# Altium PCB Current Loop PM8841.PcbDoc
Units mil, origin at the board's own origin, x right, y up, seen from the top; angles counter-clockwise.
Board outline 1375 x 890 mil, 2 copper layers (Top Layer, Bottom Layer); 18 components, 12 nets, 44 pads, 7 vias.
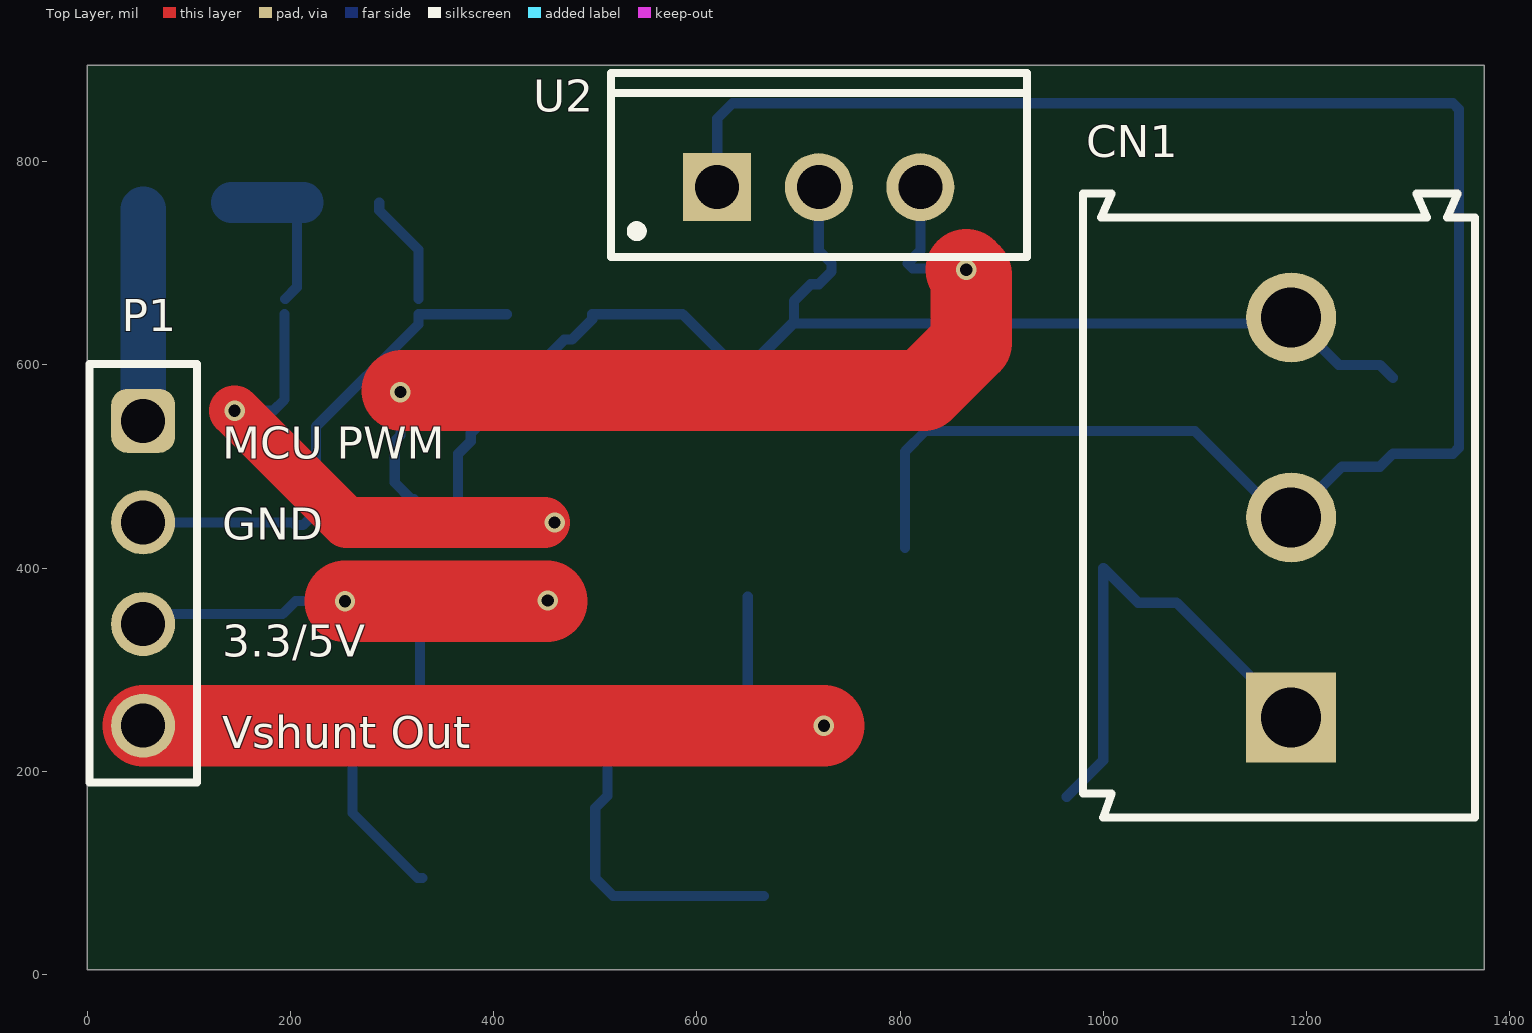
[diagram p0: Top Layer view]
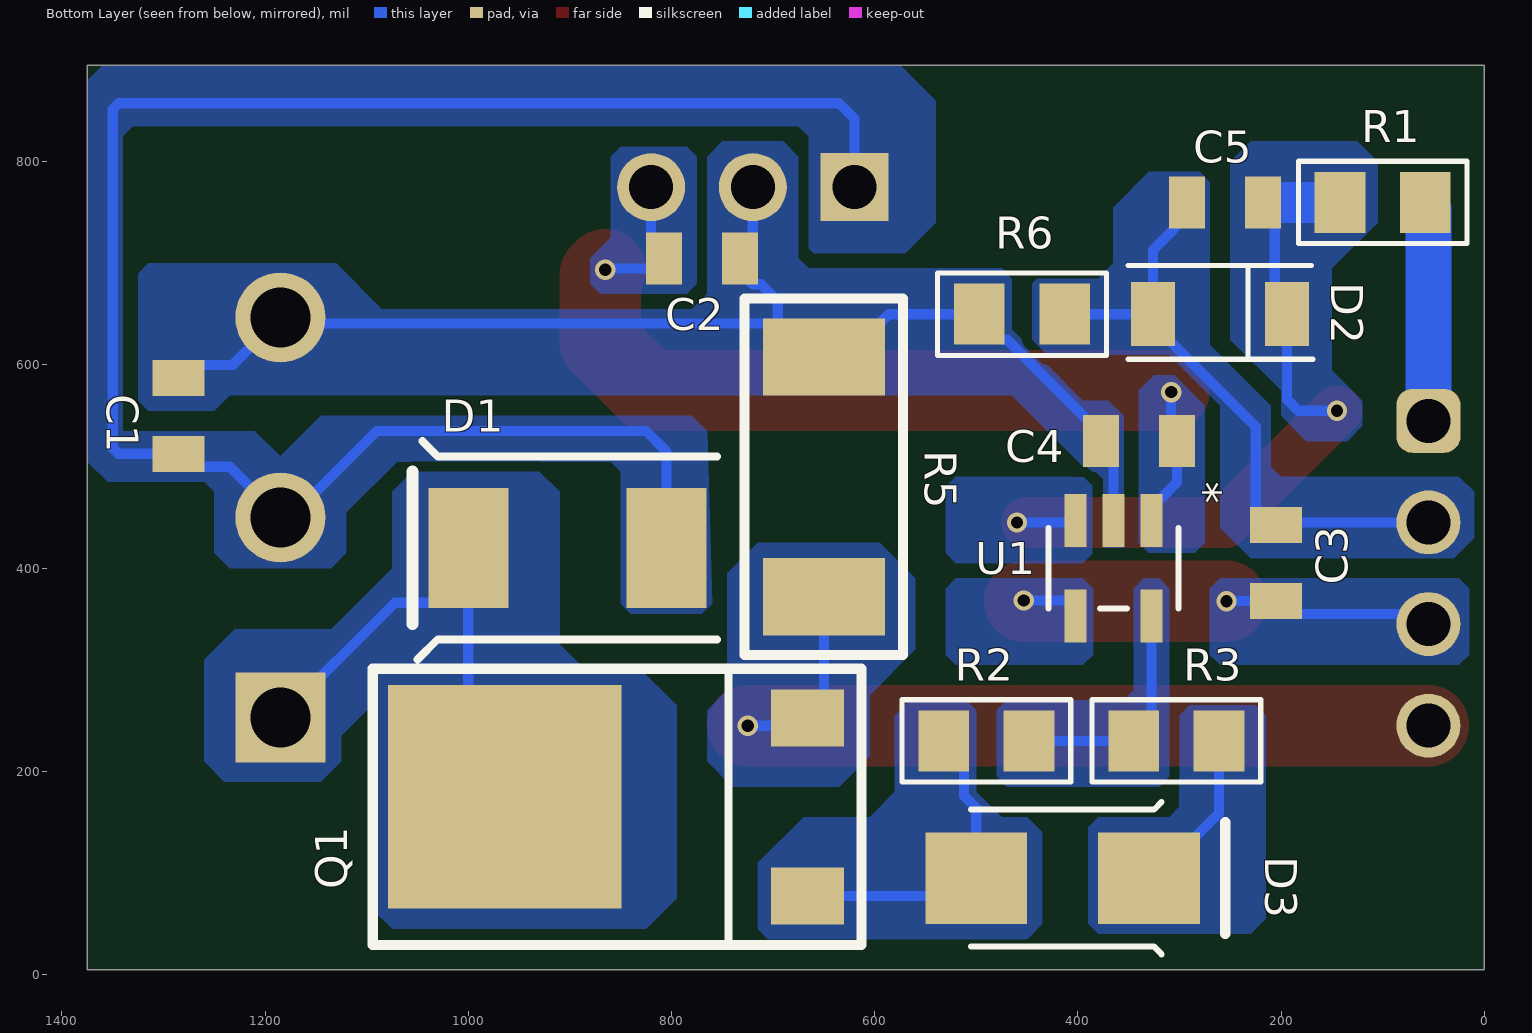
[diagram p1: Bottom Layer view, seen from below]
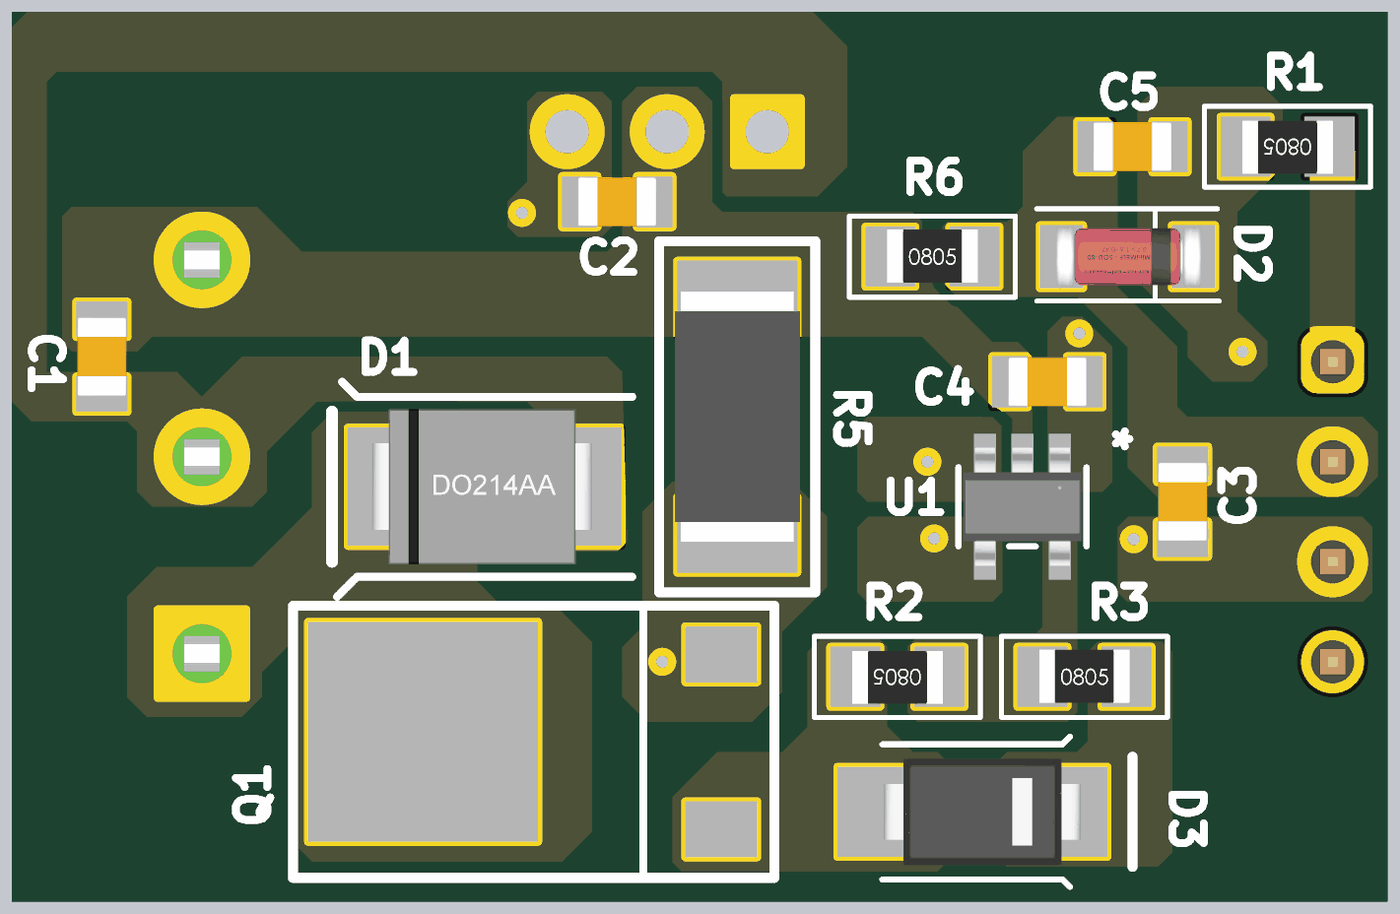
[diagram p2: 3D render of the assembled board from below, using the file's embedded part models]

## Layer stack, top to bottom
Top Solder: solder mask 0.4, Solder Resist, Dk 3.5
Top Layer: signal copper 1.4
Dielectric 1: dielectric 12.6, FR-4, Dk 4.8
Bottom Layer: signal copper 1.4
Bottom Solder: solder mask 0.4, Solder Resist, Dk 3.5

## Board outline
0,5 1375,5 1375,895 0,895

## Design rules (kind name [scope] priority, off if disabled: settings)
Clearance [All] p1: gap=10 ignorepadtopadclearanceinfootprint=FALSE except(0: Arc-Hole Track-Hole SMDPad-Hole THPad-Hole Via-Hole Fill-Hole Poly-Hole Region-Hole Text-Hole)
MinimumSolderMaskSliver [All] p1: minsoldermaskwidth=2
PlaneConnect [All] p1: planeconnectstyle=Direct reliefexpansion=20 reliefentries=4 reliefconductorwidth=10 reliefairgap=10
PolygonConnect [All] p1: connectstyle=Direct reliefconductorwidth=10 reliefentries=4 polygonreliefangle="90 Angle" airgapwidth=10
RoutingVias [All] p1: holewidth=28 width=50 viastyle="Through Hole" minholewidth=28 minwidth=50 maxholewidth=28 maxwidth=50
SilkToSilkClearance [All] p1: silktosilkclearance=5
SilkToSolderMaskClearance [IsPad] p1: minsilkscreentomaskgap=2 clearancetoexposedcopper=TRUE
SolderMaskExpansion [All] p1: expansion=4 istentingtop=FALSE
Width [All] p1: maxlimit=200 minlimit=10 preferedwidth=10 minimp=50.000000 maximp=50.000000 favimp=50.000000
26 further rules are at their usual default settings.

## Components (designator, comment, footprint, x,y, rotation, side; value= is the part's Value field where it differs from the comment)
C1 "330nF" WCAP-CSGP_0805_L2W1.25H1.25 1285,550 r270 bottom
C2 "100nF" WCAP-CSGP_0805_L2W1.25H0.8_Reflow 770,705 r0 bottom
C3 "1µF" WCAP-CSGP_0805_L2W1.25H1.25 205,405 r270 bottom
C4 "1µF" WCAP-CSGP_0805_L2W1.25H1.25 340,525 r180 bottom
C5 "47pF" WCAP-CSGP_0805_L2W1.25H0.6_Reflow 255,760 r180 bottom
CN1 "691216710003" 691216710003 1173.19,450 r90 top
D1 "SMB" SMB 905,420 r180 bottom
D2 "5V6" SOD80 260,650 r0 bottom
D3 "SMA_Schottky" SMA 415,95 r0 bottom
P1 "61300411121" 61300411121 55,395 r270 top
Q1 "STD30NF06LT4" NFET_DPAK 815,165 r0 bottom
R1 "470R" SM/R_0805 100,760 r0 bottom
R2 "22R" SM/R_0805 490,230 r0 bottom
R3 "4R7" SM/R_0805 303,230 r180 bottom
R5 "1R - 2W" SM/R_2512 650,490 r270 bottom
R6 "NM" SM/R_0805 455,650 r180 bottom
U1 "PM8841D" SOT23-5_STM 365,400 r270 bottom
U2 "L7812CV" TO220 720,775 r0 top

## Footprints (in the part's own frame and the unit in brackets; to place one, negate y for a bottom-side part, rotate by r counter-clockwise, add the part's x,y. Pads: shape width x height; smd on the part's side, far side on the other; paste and mask are expansions set on the pad)
61300411121 [mm] "Pin Header, pitch 2.54 mm, THT, Vertical, single row, 4p"
  rrect50% 1.6x1.6 hole 1.1: 1(-3.81,0)
  round 1.6 hole 1.1: 2(-1.27,0) 3(1.27,0) 4(3.81,0)
  silkscreen extent -5.23,-1.35 5.23,1.35, body extent -5.08,-1.27 5.08,1.27, height 8.57
691216710003 [mm] "Serie 2167 - 5.00 mm _ 3 pins"
  rect 2.25x2.25 hole 1.5: 1(-5,-0.3)
  round 2.25 hole 1.5: 2(0,-0.3) 3(5,-0.3)
  silkscreen extent -7.5,-4.9 8.1,4.9, body extent -7.5,-4.9 8.1,4.9, height 13.85
NFET_DPAK [mil]
  rect 230x220 smd: D(149,-10)
  rect 72x56 smd: G(-149,87.5) S(-149,-87.5)
  silkscreen extent -202,-136 279,136
SM/R_0805 [mil]
  rect 50x60 smd: 1(-42,0) 2(42,0)
  silkscreen extent -83,-40 83,40, body extent -45,-26 45,27, height 30
SM/R_2512 [mil]
  rect 76x120 smd: 1(-118,0) 2(118,0)
  silkscreen extent -176,-78 176,78, body extent -125,-63 125,63, height 20
SMA [mil]
  rect 100x90 smd: A(85,0) K(-85,0)
  silkscreen extent -160,-75 90,75, body extent -108,-53 88,53, height 95
SMB [mm]
  rect 2x3 smd: A(-2.413,0) K(2.54,0)
  silkscreen extent -3.81,-2.79 3.81,2.67, body extent -2.79,-1.97 2.79,1.97, height 2.6
SOD80 [mm] "LL4148"
  rect 1.1x1.6 smd: A(1.675,0) K(-1.675,0)
  silkscreen extent -2.32,-1.22 2.3,1.13, body extent -1.88,-0.8 1.82,0.8, height 1.6
SOT23-5_STM [mil]
  rect 52x22 smd paste+0 mask+0: 1(-47,37.4) 2(-47,0) 3(-47,-37.4) 4(47,-37.4) 5(47,37.4)
  silkscreen extent -40,-64 40,64, body extent -59,-59 59,59, height 57
TO220 [mm] "TO, Thru-Hole, Vertical, Heatsink Mounted; 3 In-Line Leads; Pitch 2.54 mm"
  rect 1.7x1.7 hole 1.1: 1(-2.54,0)
  round 1.7 hole 1.1: 2(0,0) 3(2.54,0)
  silkscreen extent -5.2,-1.75 5.2,2.85, body extent -5.25,-1.8 5.25,2.9, height 19.7
WCAP-CSGP_0805_L2W1.25H0.6_Reflow [mm] "Ceramic Capacitors, body 2x1.25mm"
  rect 0.9x1.3 smd: 1(-0.95,0) 2(0.95,0)
  body extent -1,-0.63 1,0.63, height 0.6
WCAP-CSGP_0805_L2W1.25H0.8_Reflow [mm] "Ceramic Capacitors, body 2x1.25mm"
  rect 0.9x1.3 smd: 1(-0.95,0) 2(0.95,0)
  body extent -1,-0.62 1,0.63, height 0.8
WCAP-CSGP_0805_L2W1.25H1.25 [mm] "Ceramic Capacitors, body 2x1.25mm"
  rect 0.9x1.3 smd: 1(-0.95,0) 2(0.95,0)
  body extent -1,-0.63 1,0.63, height 1.25

## Part data
C1: library part 885012207101, "WCAP-CSGP Multilayer Ceramic Chip Capacitor, General Purpose, size 0805, X7R, 330nF, 50VDC", Capacitance Tolerance=+/-10%, Case/Size Code=0805, Insulation Resistance=1.5GΩ, Manufacturer="Wurth Elektronik", Operating Temperature Max=125°C, Operating Temperature Min=-55°C, Rated Voltage (DC)=50V, Capacitance=330nF, Category="Multilayer Ceramic Chip Capacitors", Ceramic Type=X7R, ComponentLink1Description="Website Link", ComponentLink1URL=https://www.we-online.com/redexpert/article/885012207101?ad, ComponentLink2Description="Datasheet Link", ComponentLink2URL=https://www.we-online.com/redexpert/spec/885012207101?ad, Dissipation Factor=3%, Height=1.25mm, Length=2mm, Manufacturer Part Number=885012207101, Match Code=WCAP-CSGP, Mount="Surface Mount", Packaging="Tape and Reel", Technical Reference=X7R0805334K050DFCT10000, Width=1.25mm
C2: library part 885012207072, "WCAP-CSGP Multilayer Ceramic Chip Capacitor, General Purpose, size 0805, X7R, 100nF, 25VDC", Capacitance Tolerance=+/-10%, Case/Size Code=0805, Insulation Resistance=5GΩ, Manufacturer="Wurth Elektronik", Operating Temperature Max=125°C, Operating Temperature Min=-55°C, Rated Voltage (DC)=25V, Capacitance=100nF, Category="Multilayer Ceramic Chip Capacitors", Ceramic Type=X7R, ComponentLink1Description="Website Link", ComponentLink1URL=https://www.we-online.com/redexpert/article/885012207072?ad, ComponentLink2Description="Datasheet Link", ComponentLink2URL=https://www.we-online.com/redexpert/spec/885012207072?ad, Dissipation Factor=3.5%, Height=0.8mm, Length=2mm, Manufacturer Part Number=885012207072, Match Code=WCAP-CSGP, Mount="Surface Mount", Packaging="Tape and Reel", Technical Reference=X7R0805104K025DFCT10000, Width=1.25mm
C3 C4: library part 885012207078, "WCAP-CSGP Multilayer Ceramic Chip Capacitor, General Purpose, size 0805, X7R, 1µF, 25VDC", Capacitance Tolerance=+/-10%, Case/Size Code=0805, Insulation Resistance=0.5GΩ, Manufacturer="Wurth Elektronik", Operating Temperature Max=125°C, Operating Temperature Min=-55°C, Rated Voltage (DC)=25V, Capacitance=1µF, Category="Multilayer Ceramic Chip Capacitors", Ceramic Type=X7R, ComponentLink1Description="Website Link", ComponentLink1URL=https://www.we-online.com/redexpert/article/885012207078?ad, ComponentLink2Description="Datasheet Link", ComponentLink2URL=https://www.we-online.com/redexpert/spec/885012207078?ad, Dissipation Factor=5%, Height=1.25mm, Length=2mm, Manufacturer Part Number=885012207078, Match Code=WCAP-CSGP, Mount="Surface Mount", Packaging="Tape and Reel", Technical Reference=X7R0805105K025DFCT10000, Width=1.25mm
C5: library part 885012007032, "WCAP-CSGP Multilayer Ceramic Chip Capacitor, General Purpose, size 0805, NP0, 47pF, 25VDC", Capacitance Tolerance=+/-5%, Case/Size Code=0805, Insulation Resistance=10GΩ, Manufacturer="Wurth Elektronik", Operating Temperature Max=125°C, Operating Temperature Min=-55°C, Rated Voltage (DC)=25V, Capacitance=47pF, Category="Multilayer Ceramic Chip Capacitors", Ceramic Type=NP0, ComponentLink1Description="Website Link", ComponentLink1URL=https://www.we-online.com/redexpert/article/885012007032?ad, ComponentLink2Description="Datasheet Link", ComponentLink2URL=https://www.we-online.com/redexpert/spec/885012007032?ad, Height=0.6mm, Length=2mm, Manufacturer Part Number=885012007032, Match Code=WCAP-CSGP, Mount="Surface Mount", Packaging="Tape and Reel", Q Factor=1000, Technical Reference=NP00805470J025DFCT10000, Width=1.25mm
CN1: "WR-TBL Serie 2167 Horizontal Entry Modular, Rising Cage Clamp, pitch 5mm, 3p", Operating Temperature="-30 to +120degC", Rated Current [UL]=14A, Working Voltage [UL]=300VAC, Application="Rising Cage Clamp", Compliance="Lead free / RoHS;​ ROHS & Reach", ComponentLink1Description=Manufacturer, ComponentLink1URL=http://www.we-online.de, ComponentLink2Description=Datasheet, ComponentLink2URL=https://katalog.we-online.de/em/datasheet/691216710003.pdf, Modularity=Yes, Mounting Technology=THT, Packaging=Box, Part Number=691216710003, PCB/Cable/Panel=PCB, Pin Number=3, Pitch=5mm, Published Date="October 2019", Publisher="Wurth Elektronik", Type=Horizontal
D1: Manufacturer=STMicroelectronics
D2: library part SOD80_zener
D3: Package/Class=SM, Value/Generic Part Number="Schottky Diode"
P1: "WR-PHD Pin Header, THT, Vertical, pitch 2.54mm, 1 Row, 4P", Contact Resistance=20mΩ, Manufacturer="Wurth Elektronik", Operating Temperature Max=105°C, Operating Temperature Min=-40°C, Rated Current=3A, Withstanding Voltage=500V, Working Voltage=250V, Category="Board-to-Board Connectors", ComponentLink1Description="Website Link", ComponentLink1URL=https://www.we-online.com/redexpert/article/61300411121?ad, ComponentLink2Description="Datasheet Link", ComponentLink2URL=https://www.we-online.com/redexpert/spec/61300411121?ad, Gender="Pin Header", Manufacturer Part Number=61300411121, Match Code=WR-PHD, Mount="Through Hole", Number of Pins=4, Number of Rows=1, Orientation=Vertical, Packaging=Bag, Pitch=2.54mm
Q1: library part NFET, Manufacturer=STMicroelectronics, Package/Class=SM, Value/Generic Part Number=NFET_DPAK, Mfg P/N=NFET_D2PAK
R1 R2 R3 R6: library part SMRes, Resistor Type="FIXED RESISTOR", Category="Chip SMD Resistors", Mount="Surface Mount", Mounting=SMD, Number of Pins=2, Pricing 1="10=0.67400, 100=0.52000, 250=0.49300, 500=0.33100, 1000=0.28900 (USD)", RoHS=Yes, Stock 1=1
R5: library part SMRes, Mounting=SMD
U1: "No Description Available", Mfr_Name=STMicroelectronics, RefDes=RefDes, Type=Type
U2: library part CMP-0244-00450-1, "Positive Voltage Regulator, 12V, 3-Pin TO-220", ComponentLink1Description="Manufacturer URL", ComponentLink1URL=http://www.st.com, ComponentLink2Description=Datasheet, ComponentLink2URL=http://www.st.com/internet/com/TECHNICAL_RESOURCES/TECHNICAL_LITERATURE/DATASHEET/CD00000444.pdf, ComponentLink3Description="Package Specification", ComponentLink3URL=http://www.st.com/internet/com/TECHNICAL_RESOURCES/TECHNICAL_LITERATURE/PACKAGE_INFORMATION/CD00004649.pdf, DatasheetVersion=16/11/2011, PackageDescription="TO, Thru-Hole, Vertical, Heatsink Mounted; 3 In-Line Leads; Pitch 2.54 mm", PackageReference=TO220, PackageVersion=ver3.0

## Via types
v1: diameter 20, hole 12.01, Top Layer to Bottom Layer, 7 vias

## Nets (pads, with @x,y where several pads share a name; then routed paths per layer and width w, separated by ;. In a path a pad name is that pad's centre, name@x,y a point inside that pad or via, vN(x,y) a via of type N, cw(c..) or ccw(c..) an arc to the next point about the centre after c; other vN are vias at no path point)
3.3V: C3.2 P1.3 U1.4 | length 470.3
  Top Layer w10: v1@452.54,367.54 v1@455,370
  Top Layer w80: v1(253.7,367.54) v1@452.54,367.54
  Bottom Layer w10: P1.3 64.88,354.88 192.28,354.88 C3.2 247.4,367.6 v1@250,365 ; U1.4 402.4,362.28 408.4,368.28 v1(453.18,368.28)
+12: C2.2 C4.2 U1.1 U2.3 | length 933.7
  Top Layer w80: v1@310,575 823.14,575 870,621.86 870,688.95 v1(865.15,693.8)
  Bottom Layer w10: v1(308.18,573.28) 308.18,530.58 C4.2 302.6,484.41 319.01,468 321.6,468 327.6,462 U1.1 ; U2.3 820,712.6 807.4,700 812.4,695 v1@865,695
+24: C1.2 CN1.2 D1.K U2.1 | length 1851.4
  Bottom Layer w10: U2.1 620,842.53 635.14,857.68 1344.14,857.68 1350,851.82 1350,518.46 1344.14,512.6 C1.2 1272.28,499.88 1234.88,499.88 CN1.2 1175,450 1090,535 825,535 805,515 D1.K
A0: P1.4 Q1.S R5.2 | length 858.2
  Top Layer w80: P1.4 v1(725,245)
  Bottom Layer w10: R5.2 650,268.5 Q1.S 673.5,245 v1(725,245)
GATE: D3.A Q1.G R2.2 | length 321.5
  Bottom Layer w10: R2.2 512,210 512,176 500,164 D3.A 517.5,77.5 Q1.G
GND: C1.1 C2.1 C4.1 CN1.3 R5.1 R6.1 U1.2 U2.2 | length 1326.5
  Bottom Layer w10: U1.2 365,512.6 C4.1 377.4,532.87 469.53,625 477,625 497,645 R6.1 586,650 628,608 R5.1 ; U2.2 720,712.6 732.6,700 732.6,692.13 719.88,679.41 712.01,679.41 695.48,662.88 695.48,641 662.48,608 R5.1 ; C1.1 1272.28,600.12 1231.73,600.12 CN1.3 1179.15,641 694,641 661,608 R5.1
NetC5_2: C5.2 D2.K R1.2 U1.3 | length 710.7
  Top Layer w50: v1(145,555) 255,445 v1@450,445
  Bottom Layer w10: v1(145,555) 183.11,555 194.06,565.94 D2.K ; D2.K@194.8,665 206.3,676.5 C5.2@206.3,753.7 ; U1.3 404.4,445 v1(460,445)
  Bottom Layer w40: R1.2 C5.2@212.6,760
NetCN1_1: CN1.1 D1.A Q1.D | length 486.2
  Bottom Layer w10: Q1.D 1000,211 1000,400.32 1034.37,365.95 1072.2,365.95 CN1.1
NetD3_K: D3.K R3.2 | length 166.5
  Bottom Layer w10: R3.2 261,159 325,95 D3.K
NetR2_1: R2.1 R3.1 U1.5 | length 233.2
  Bottom Layer w10: U1.5 327.6,247.4 R3.1 R2.1
PRE_GATE: P1.1 R1.1 | length 217.9
  Bottom Layer w10: R1.1 R1.1@65,753
  Bottom Layer w45: P1.1 R1.1@55,753
Signal_Ref: C3.1 C5.1 D2.A P1.2 R6.2 | length 611.1
  Bottom Layer w10: P1.2 202.4,445 C3.1 212.28,442.4 225,455.12 225,539.21 325.94,640.16 D2.A R6.2 ; C5.1@287.4,760 287.4,752.13 325.94,713.58 D2.A@325.94,665

## Polygon pours and split planes (outlines as drawn)
NetD3_K on Bottom Layer "NETD3_K_L02_P014" (solid, pour order 14): 215,55 230,40 380,40 390,50 390,145 380,155 310,155 300,165 300,255 290,265 225,265 215,255
+12 on Bottom Layer "+12_L02_P013" (solid, pour order 13): 305,590 325,590 340,575 340,425 330,415 285,415 275,425 275,560
NetR2_1 on Bottom Layer "NETR2_1_L02_P012" (solid, pour order 12): 310,260 310,380 320,390 335,390 345,380 345,280 355,270 470,270 480,260 480,195 470,185 320,185 310,195
+12 on Bottom Layer "+12_L02_P011" (solid, pour order 11): 880,705 860,725 860,805 850,815 785,815 775,805 775,680 785,670 870,670 880,680
+24 on Bottom Layer "+24_L02_P010" (solid, pour order 10): 760,365 770,355 840,355 850,365 850,495 860,505 1070,505 1120,455 1120,415 1135,400 1235,400 1250,415 1250,475 1260,485 1355,485 1375,505 1375,880 1360,895 575,895 540,860 540,740 570,710 660,710 665,715 665,825 675,835 1330,835 1340,825 1340,535 1210,535 1185,510 1145,550 780,550 765,535
GATE on Bottom Layer "GATE_L02_P009" (solid, pour order 9): 435,140 450,155 455,155 475,155 500,180 500,260 510,270 565,270 580,255 580,180 605,155 670,155 715,110 715,45 705,35 450,35 435,50
NetCN1_1 on Bottom Layer "NETCN1_1_L02_P008" (solid, pour order 8): 1075,45 1095,65 1095,260 1100,260 1125,235 1125,210 1145,190 1240,190 1260,210 1260,310 1230,340 1135,340 1075,400 1075,475 1055,495 930,495 910,475 910,325 890,305 835,305 795,265 795,75 825,45 860,45
GND on Bottom Layer "GND_L02_P006" (solid, pour order 6): 375,487.5 382.5,495 390,495 465,570 1235,570 1250,555 1315,555 1325,565 1325,690 1315,700 1130,700 1085,655 780,655 765,670 765,805 750,820 690,820 675,805 675,705 665,695 475,695 465,685 465,635 395,565 370,565 355,550 355,420 375,420
NetC5_2 on Bottom Layer "NETC5_2_L02_P005" (solid, pour order 5): 385,480 395,490 520,490 530,480 530,415 520,405 395,405 385,415
NetC5_2 on Bottom Layer "NETC5_2_L02_P004" (solid, pour order 4): 120,565 150,595 150,695 105,740 105,800 125,820 230,820 250,800 250,625 200,575 200,550 175,525 135,525 120,540
3.3V on Bottom Layer "3.3V_L02_P003" (solid, pour order 3): 15,380 25,390 260,390 270,380 270,315 260,305 25,305 15,315
3.3V on Bottom Layer "3.3V_L02_P002" (solid, pour order 2): 385,380 395,390 520,390 530,380 530,315 520,305 395,305 385,315
A0 on Bottom Layer "A0_L02_P001" (solid, pour order 1): 560,390 595,425 715,425 745,395 745,280 765,260 765,210 740,185 635,185 605,215 605,275 560,320
Signal_Ref on Bottom Layer "SIGNAL_REF_L02_P000" (solid, pour order 0): 270,780 280,790 330,790 365,755 365,700 380,685 440,685 445,680 445,625 430,610 310,610 260,560 260,440 230,410 30,410 10,430 10,475 25,490 200,490 210,500 210,560 270,620

## Silkscreen, mask and mechanical layers (free items; w line width, h text height)
Top Overlay:
  text "MCU PWM" at 132.87,507.87 h31.5
  text "GND" at 132.87,427.87 h31.5
  text "3.3/5V" at 132.87,312.87 h31.5
  text "Vshunt Out" at 132.87,222.87 h31.5
Mechanical 1:
  the board outline again, w0.39

## Text inside footprints (layer, text, board x,y; h text height)
U1: Bottom Overlay "*" at 290,485 h31.5 r90; Mechanical 13 "*" at 346.6,437 h31.5 r90